# Altium PCB H3-chip-base.PcbDoc
Units mil, origin at the board's own origin, x right, y up, seen from the top; angles counter-clockwise.
Board outline 2027 x 2640 mil, 2 copper layers (Top Layer, Bottom Layer); 10 components, 44 nets, 118 pads, 31 vias.
Unrouted connection lines stored in the file: 24.
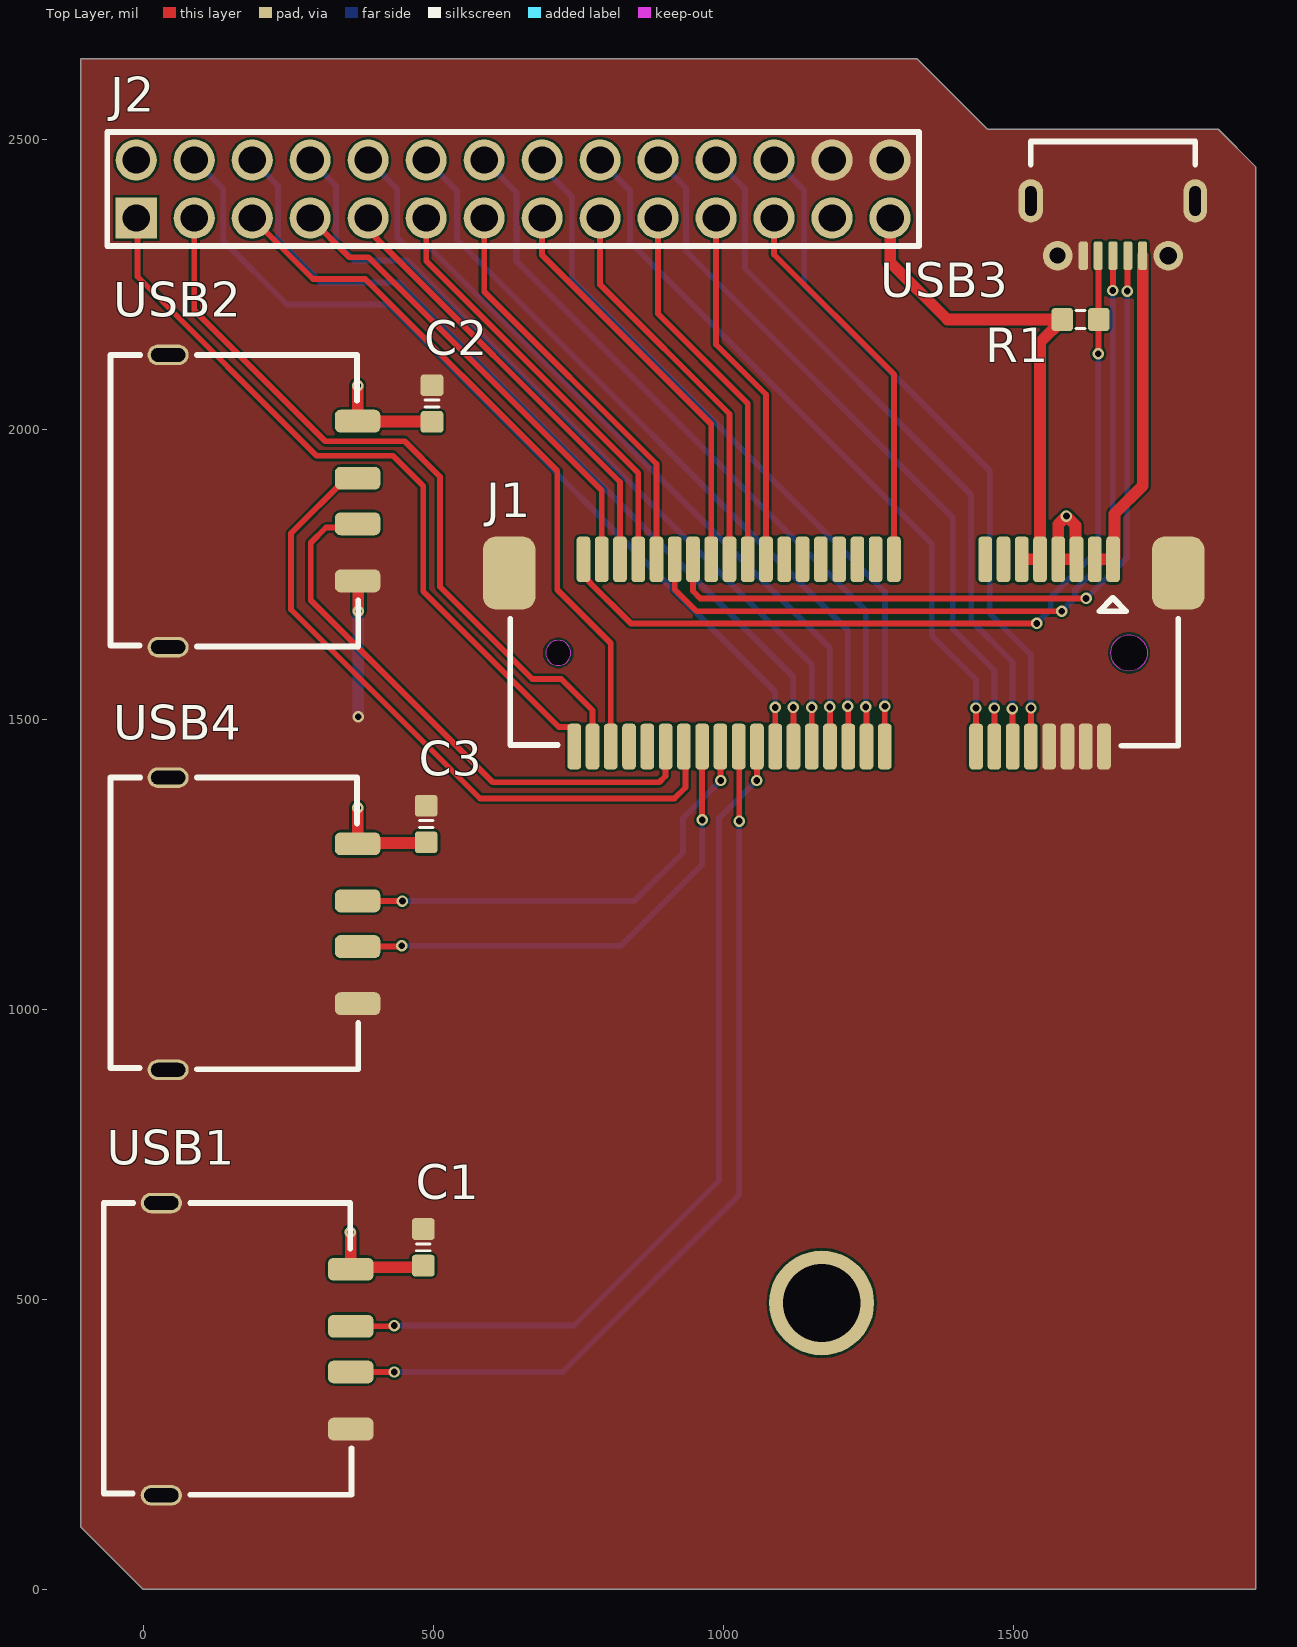
[diagram p0: Top Layer view]
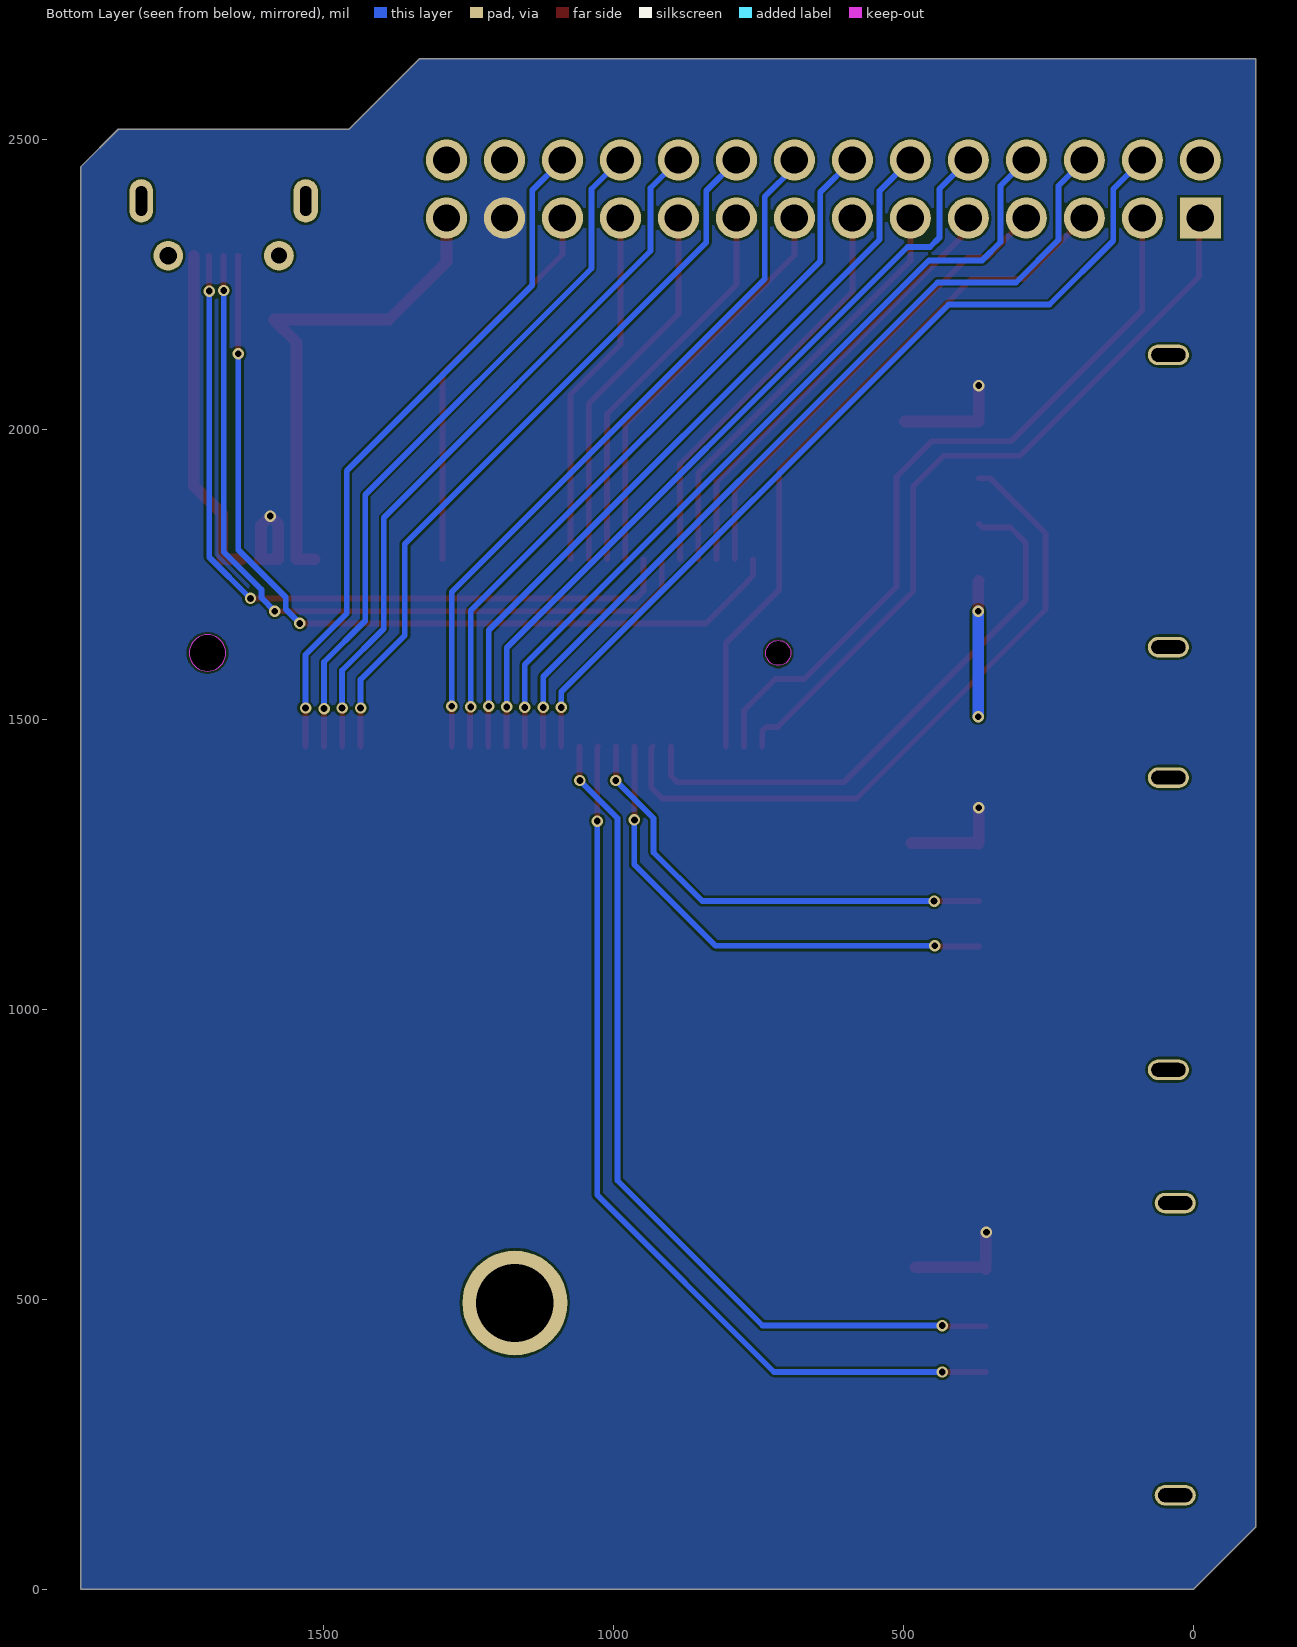
[diagram p1: Bottom Layer view, seen from below]
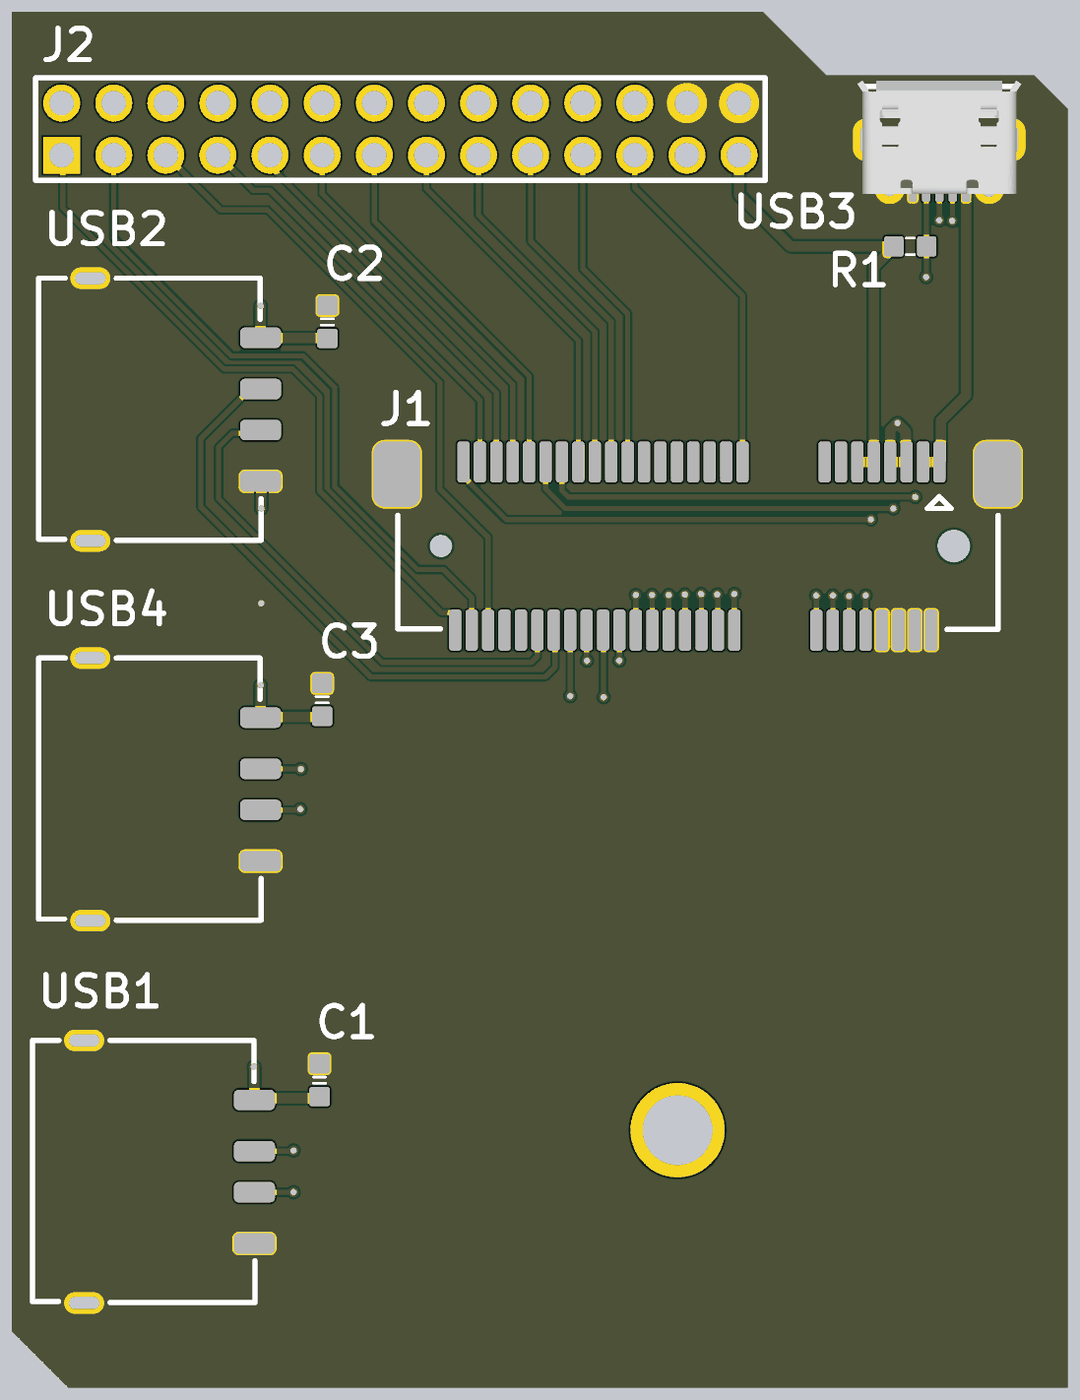
[diagram p2: 3D render of the assembled board from above, using the file's embedded part models]

## Layer stack, top to bottom
Top Solder: solder mask 0.4, Solder Resist, Dk 3.5
Top Layer: signal copper 1.4
Dielectric 1: dielectric 12.6, FR-4, Dk 4.8
Bottom Layer: signal copper 1.4
Bottom Solder: solder mask 0.4, Solder Resist, Dk 3.5

## Board outline
-108,108 0,0 1919,0 1919,2453 1854,2518 1456,2518 1334,2640 -108,2640

## Design rules (kind name [scope] priority, off if disabled: settings)
Clearance [All] p1: gap=4 ignorepadtopadclearanceinfootprint=FALSE except(0: Arc-Hole Track-Hole SMDPad-Hole THPad-Hole Via-Hole Fill-Hole Poly-Hole Region-Hole Text-Hole)
ComponentClearance [All] p1: gap=0 collisioncheckmode=3 verticalgap=0 showdistances=FALSE
DiffPairsRouting [All] p1: maxlimit=4 minlimit=4 mostfreqgap=4 toplayer_minwidth=4 toplayer_maxwidth=4 toplayer_prefwidth=4 bottomlayer_minwidth=4 bottomlayer_maxwidth=4 bottomlayer_prefwidth=4 maxuncoupledlength=500
FanoutControl Fanout_BGA [All] p1: bgadir=Out bgaviamode=Centered fanoutstyle=Auto fanoutdirection=Alternating viagrid=1 // Fanout_BGA (Default Rule)
HoleSize [All] p1: absolutevalues=TRUE maxlimit=10000 minlimit=8 maxpercent=80.000 minpercent=20.000
MinimumSolderMaskSliver [All] p1 off: minsoldermaskwidth=2
PlaneClearance [All] p1: clearance=8
PlaneConnect [All] p1: planeconnectstyle=Direct reliefexpansion=20 reliefentries=4 reliefconductorwidth=10 reliefairgap=10
PolygonConnect [All] p1: connectstyle=Direct reliefconductorwidth=10 reliefentries=4 polygonreliefangle="90 Angle" airgapwidth=10
RoutingVias [All] p1: holewidth=11.81 width=19.68 viastyle="Through Hole" minholewidth=11.81 minwidth=19.68 maxholewidth=28 maxwidth=50
SilkToSilkClearance [All] p1: silktosilkclearance=0
SilkToSolderMaskClearance [IsPad] p1: minsilkscreentomaskgap=0 clearancetoexposedcopper=TRUE
SolderMaskExpansion [All] p1: expansion=3
Width GND [(InNet('AGND') OR InNet('GND'))] p1: maxlimit=50 minlimit=4 preferedwidth=20
Width VCC [(InNet('VDD_SYS_3.3V') OR InNet('VDD_AV_3.3V') OR InNet('VDD_5V') OR InNet('VDD1V2-SYS') OR InNet('VDD1V1-EPHY') OR InNet('VDD-CPUX') OR InNet('VDD-CPUS') OR InNet('VDD-CPUFB') OR InNet('VCC-DRAM'))] p2: maxlimit=50 minlimit=4 preferedwidth=20
Width [All] p3: maxlimit=10000 minlimit=4 preferedwidth=10
21 further rules are at their usual default settings.

## Components (designator, comment, footprint, x,y, rotation, side; value= is the part's Value field where it differs from the comment)
C1 "22uF" CAP_0603 483,590 r90 top
C2 "22uF" CAP_0603 498,2045 r90 top
C3 "22uF" CAP_0603 488,1320 r90 top
J1 "mini PCI-E座" "mini PCI-E座" 1208,1615 r180 top
J2 "2*14p 2.54mm排针" "2*14p 2.54mm排针" 638,2415 r0 top
R1 "10K" RES_0603 1616.5,2190 r0 top
USB1 "USB typeA座" "USB typeA座" 358,414.37 r270 top
USB2 "USB typeA座" "USB typeA座" 369.77,1876.97 r270 top
USB3 "MicroUSB" MicroUSB 1672.41,2300 r180 top
USB4 "USB typeA座" "USB typeA座" 369.77,1148.03 r270 top

## Footprints (in the part's own frame and the unit in brackets; to place one, negate y for a bottom-side part, rotate by r counter-clockwise, add the part's x,y. Pads: shape width x height; smd on the part's side, far side on the other; paste and mask are expansions set on the pad)
"2*14p 2.54mm排针" [mm] "2*14p 2.54mm排针"
  rect 1.8x1.8 hole 1.2 mask+0.076: 1(-16.51,-1.27)
  round 1.8 hole 1.2 mask+0.076: 2(-16.51,1.27) 3(-13.97,-1.27) 4(-13.97,1.27) 5(-11.43,-1.27) 6(-11.43,1.27) 7(-8.89,-1.27) 8(-8.89,1.27) 9(-6.35,-1.27) 10(-6.35,1.27) 11(-3.81,-1.27) 12(-3.81,1.27) 13(-1.27,-1.27) 14(-1.27,1.27) 15(1.27,-1.27) 16(1.27,1.27) 17(3.81,-1.27) 18(3.81,1.27) 19(6.35,-1.27) 20(6.35,1.27) 21(8.89,-1.27) 22(8.89,1.27) 23(11.43,-1.27) 24(11.43,1.27) 25(13.97,-1.27) 26(13.97,1.27) 27(16.51,-1.27) 28(16.51,1.27)
  silkscreen extent -17.78,-2.5 17.78,2.5, body extent -17.78,-2.54 17.78,2.54, height 8.51
CAP_0603 [mm] "0603 Capacitor"
  rrect30% 0.95x1 smd mask+0.076: 1(-0.8,0) 2(0.8,0)
  silkscreen extent -0.15,-0.3 0.15,0.3
MicroUSB [mm] "MicroUSB"
  oval 1.03x1.9 hole 1.3 slot 0.5 at 0 deg mask+0.076: 0(-3.6,-2.4)
  round 1.3 hole 0.762 mask+0.076: 0(-2.425,0)
  round 1.3 hole 0.7 mask+0.076: 0(2.425,0)
  oval 1.07x1.9 hole 1.3 slot 0.5 at 0 deg mask+0.076: 0(3.6,-2.4)
  rrect50% 0.4x1.25 smd mask+0.076: 1(-1.3,0) 2(-0.65,0) 3(0,0) 4(0.65,0) 5(1.3,0)
  silkscreen extent -3.6,-5 3.6,-4, body extent -4,-5.29 4,0.24, height 2.74
"mini PCI-E座" [mm] "mini PCI-E座"
  rrect50% 0.6x2 smd mask+0.076: 1(-11.8,-4.1) 2(-11.4,4.1) 3(-11,-4.1) 4(-10.6,4.1) 5(-10.2,-4.1) 6(-9.8,4.1) 7(-9.4,-4.1) 8(-9,4.1) 9(-8.6,-4.1) 10(-8.2,4.1) 11(-7.8,-4.1) 12(-7.4,4.1) 13(-7,-4.1) 14(-6.6,4.1) 15(-6.2,-4.1) 16(-5.8,4.1) 17(-2.2,-4.1) 18(-1.8,4.1) 19(-1.4,-4.1) 20(-1,4.1) 21(-0.6,-4.1) 22(-0.2,4.1) 23(0.2,-4.1) 24(0.6,4.1) 25(1,-4.1) 26(1.4,4.1) 27(1.8,-4.1) 28(2.2,4.1) 29(2.6,-4.1) 30(3,4.1) 31(3.4,-4.1) 32(3.8,4.1) 33(4.2,-4.1) 34(4.6,4.1) 35(5,-4.1) 36(5.4,4.1) 37(5.8,-4.1) 38(6.2,4.1) 39(6.6,-4.1) 40(7,4.1) 41(7.4,-4.1) 42(7.8,4.1) 43(8.2,-4.1) 44(8.6,4.1) 45(9,-4.1) 46(9.4,4.1) 47(9.8,-4.1) 48(10.2,4.1) 49(10.6,-4.1) 50(11,4.1) 51(11.4,-4.1) 52(11.8,4.1)
  rrect50% 2.3x3.2 smd: 53(-14.65,-3.5) 54(14.65,-3.5)
  Keep-Out Layer board cut-out: 11.95,0 11.992,-0.21 12.111,-0.389 12.29,-0.508 12.5,-0.55 12.5,-0.55 12.71,-0.508 12.889,-0.389 13.008,-0.21 13.05,0 13.05,0 13.008,0.21 12.889,0.389 12.71,0.508 12.5,0.55 12.5,0.55 12.29,0.508 12.111,0.389 11.992,0.21 11.95,0
  Keep-Out Layer board cut-out: -12.5,-0.8 -12.806,-0.739 -13.066,-0.566 -13.239,-0.306 -13.3,0 -13.3,0 -13.239,0.306 -13.066,0.566 -12.806,0.739 -12.5,0.8 -12.5,0.8 -12.194,0.739 -11.934,0.566 -11.761,0.306 -11.7,0 -11.7,0 -11.761,-0.306 -11.934,-0.566 -12.194,-0.739 -12.5,-0.8
  silkscreen extent -14.66,-2.41 14.6,4.06, body extent -15.03,-5.1 14.97,5.1, height 4.01
RES_0603 [mm] "0603 Resistor"
  rrect30% 0.95x1 smd mask+0.076: 1(-0.8,0) 2(0.8,0)
  silkscreen extent -0.2,-0.4 0.2,0.4
"USB typeA座" [mm] "USB typeA座"
  oval 0.9x1.8 hole 1.5 slot 0.6 at 0 deg mask+0.076: 0(-6.4,-8.3) 0(6.4,-8.3)
  rrect50% 1x2 smd mask+0.076: 1(-3.5,0) 2(-1,0) 3(1,0) 4(3.5,0)
  silkscreen extent -6.4,-10.82 6.38,0.03, body extent -7.3,-10.86 7.3,0.03, height 6.31

## Part data
C1 C2 C3: library part CAP_0603_22uF, "0603"
R1: library part RES_0603_10K, "0603"
J1: System=Connector

## Free pads (board coordinates)
  round 181.1 hole 133.86 mask+3: PAD(1170,494)

## Via types
v1: diameter 19.68, hole 11.81, Top Layer to Bottom Layer, tented both sides, 31 vias

## Nets (pads, with @x,y where several pads share a name; then routed paths per layer and width w, separated by ;. In a path a pad name is that pad's centre, name@x,y a point inside that pad or via, vN(x,y) a via of type N, cw(c..) or ccw(c..) an arc to the next point about the centre after c; other vN are vias at no path point)
AP-RESET#: J1.48 J2.5 | length 1220.3
  Top Layer w10: J2.5 293,2260 383,2260 714,1929 714,1724 806.43,1631.57 J1.48
GND: C1.2 C2.2 C3.2 J1.2 J1.4 J1.6 J1.8 J1.53 J1.54 J2.26 J2.28 USB1.0 USB1.4 USB2.0 USB2.4 USB3.0 USB3.5 USB4.0 USB4.4 | length 234.7
  Top Layer w20: USB2.4 371,1737.94 v1(371,1687)
  Bottom Layer w20: v1(371,1505) v1(371,1687)
GPIOA10/STATUS-LED: J1.17 J2.23 | length 674.2
  Top Layer w10: J2.23 1088,2302 1294.61,2095.39 J1.17
GPIOG11: J1.52 J2.1 | length 1313.4
  Top Layer w10: J2.1 -10,2363 -10,2264 299,1955 431,1955 483,1903 483,1721 716.62,1487.38 736.69,1487.38 743.43,1480.64 J1.52
GPIOG12/USB0_OTGID: J1.51 R1.2 USB3.4 | length 1523.6
  Top Layer w10: J1.51 759.18,1748.37 769.87,1737.68 769.87,1736.78 840.64,1666 v1(1541,1666) ; USB3.4 1647.41,2299.41 1647.41,2190.59 R1.2@1647.5,2190.5 ; v1(1647,2131) 1647.5,2131.5 R1.2@1647.5,2190.5 ; R1.2 R1.2@1647.5,2190.5
  Bottom Layer w10: v1(1541,1666) 1565.16,1690.16 1565.16,1711.16 1647,1793 v1(1647,2131)
GPIOL3/K1: J1.49 J2.7 | length 816.1
  Top Layer w10: J2.7 355.5,2297.5 388.5,2297.5 790.68,1895.32 J1.49
GPIOL4/RECOVERY: J1.47 J2.9 | length 768.4
  Top Layer w10: J2.9 388,2344 822.17,1909.83 J1.47
GPIOL10/PWR-LED: J1.45 J2.11 | length 740
  Top Layer w10: J2.11 488,2291 853.67,1925.33 J1.45
GPIOL11/IR-RX: J1.43 J2.13 | length 711.7
  Top Layer w10: J2.13 588,2238 885.17,1940.83 J1.43
I2C0_SCL: J1.20 J2.14 | length 1284.5
  Top Layer w10: v1(1246,1522) 1247.37,1520.63 J1.20
  Bottom Layer w10: J2.14 643.57,2409.43 643.57,2290.43 1246,1688 v1(1246,1522)
I2C0_SDA: J1.18 J2.16 | length 1256.3
  Top Layer w10: J1.18 1278.87,1522.87 v1(1279,1523)
  Bottom Layer w10: J2.16 688,2453 739,2402 739,2260 1279,1720 v1(1279,1523)
RPHY_LINK_LED: J1.29
RPHY_RXN: J1.23
RPHY_RXP: J1.21
RPHY_SPD_LED: J1.19
RPHY_TXN: J1.27
RPHY_TXP: J1.25
SPI0_CLK: J1.12 J2.22 | length 1224.6
  Top Layer w10: v1@1498,1520 v1(1499,1519) 1499.34,1518.66 J1.12
  Bottom Layer w10: J2.22 1038,2415 1038,2278 1428,1888 1428,1670.31 1499,1599.31 v1(1499,1519)
SPI0_CS: J1.10 J2.24 | length 1195
  Top Layer w10: J1.10 1530.83,1519.83 v1(1531,1520)
  Bottom Layer w10: J2.24 1140,2413 1140,2249 1460,1929 1460,1683 1531,1612 v1(1531,1520)
SPI0_MISO: J1.14 J2.20 | length 1251.7
  Top Layer w10: J1.14 1467.84,1519.84 v1(1468,1520)
  Bottom Layer w10: J2.20 936,2417 936,2308 1396,1848 1396,1656.81 1468,1584.81 v1(1468,1520)
SPI0_MOSI: J1.16 J2.18 | length 1280
  Top Layer w10: v1(1436,1520) 1436.35,1519.65 J1.16
  Bottom Layer w10: J2.18 788,2464 840,2412 840,2323 1360,1803 1360,1645 1436,1569 v1(1436,1520)
TV_OUT: J1.30 J2.4 | length 1528.4
  Top Layer w10: J1.30 1089.89,1520.89 v1(1090,1521)
  Bottom Layer w10: J2.4 138,2415 138,2326 248,2216 422,2216 1090,1548 v1(1090,1521)
UART0_RX: J1.44
UART0_TX: J1.46
UART1_CTS: J1.24 J2.10 | length 1364.1
  Top Layer w10: v1(1184,1522) 1184.38,1521.62 J1.24
  Bottom Layer w10: J2.10 438,2415 438,2331 454,2315 493,2315 1184,1624 v1(1184,1522)
UART1_RTS: J1.28 J2.6 | length 1477.1
  Top Layer w10: v1(1121,1521) 1121.39,1520.61 J1.28
  Bottom Layer w10: J2.6 232.43,2420.57 232.43,2327.57 306,2254 441,2254 1121,1574 v1(1121,1521)
UART1_RX: J1.26 J2.8 | length 1423.7
  Top Layer w10: J1.26 1152.88,1520.88 v1(1153,1521)
  Bottom Layer w10: J2.8 332.43,2420.57 332.43,2323.57 364,2292 456,2292 1153,1595 v1(1153,1521)
UART1_TX: J1.22 J2.12 | length 1312.9
  Top Layer w10: v1(1215,1523) 1215.87,1522.13 J1.22
  Bottom Layer w10: J2.12 541,2412 541,2328 1215,1654 v1(1215,1523)
UART2_CTS: J1.31 J2.21 | length 624.3
  Top Layer w10: J2.21 988,2147 1074.14,2060.86 J1.31
UART2_RTS: J1.35 J2.17 | length 681
  Top Layer w10: J2.17 788,2250 1011.15,2026.85 J1.35
UART2_RX: J1.37 J2.15 | length 709.4
  Top Layer w10: J2.15 688,2301 979.65,2009.35 J1.37
UART2_TX: J1.33 J2.19 | length 652.6
  Top Layer w10: J2.19 888,2200 1042.65,2045.35 J1.33
UBOOT: J1.50 J2.3 | length 1305.5
  Top Layer w10: J2.3 88,2206 314,1980 451,1980 512,1919 512,1729 671,1570 721,1570 774.93,1516.07 J1.50
USB_DM0: J1.39 USB3.2 | length 1358.7
  Top Layer w10: J1.39 948.16,1721.62 960.78,1709 v1(1626,1709) ; v1(1697,2239) 1697.5,2239.5 1697.5,2299.5 USB3.2
  Bottom Layer w10: v1(1626,1709) 1697,1780 v1(1697,2239)
USB_DM1: J1.40 USB2.2 | length 1180
  Top Layer w10: USB2.2 350.09,1916.34 255,1821.25 255,1690 581,1364 916,1364 935,1383 935,1450.99 J1.40
USB_DM2: J1.36 USB4.2 | length 805.9
  Top Layer w10: USB4.2 446.6,1187.4 v1(447,1187) ; J1.36 995.4,1395.6 v1(996,1395)
  Bottom Layer w10: v1(447,1187) 847,1187 931,1271 931,1330 v1(996,1395)
USB_DM3: J1.32 USB1.2 | length 1514.7
  Top Layer w10: USB1.2 431.74,453.74 v1(433,455) ; v1(1058,1395) 1058.39,1395.39 J1.32
  Bottom Layer w10: v1(433,455) 743,455 993,705 993,1330 v1(1058,1395)
USB_DP0: J1.41 USB3.3 | length 1384.5
  Top Layer w10: J1.41 916.66,1724.34 954,1687 v1(1584,1687) ; v1(1672,2240) 1672.41,2240.41 USB3.3
  Bottom Layer w10: v1(1584,1687) 1607.16,1710.16 1607.16,1724.16 1672,1789 v1(1672,2240)
USB_DP1: J1.42 USB2.3 | length 990.5
  Top Layer w10: USB2.3 363.57,1831.4 315.4,1831.4 289,1805 289,1706 603,1392 890.06,1392 900.91,1402.86 J1.42
USB_DP2: J1.38 USB4.3 | length 856.4
  Top Layer w10: USB4.3 442.66,1108.66 444,1110 v1(446,1110) ; J1.38 963.91,1327.09 v1(964,1327)
  Bottom Layer w10: v1(446,1110) 824,1110 964,1250 v1(964,1327)
USB_DP3: J1.34 USB1.3 | length 1570.4
  Top Layer w10: USB1.3 v1(433,375) ; J1.34 1028,1452.48 v1(1028,1325)
  Bottom Layer w10: v1(433,375) 723,375 1028,680 v1(1028,1325)
VDD_5V: C1.1 C2.1 C3.1 J1.5 J1.7 J2.25 USB1.1 USB2.1 USB4.1 | length 757.3
  Top Layer w10: USB1.1 USB1.1@361.17,555.33 ; USB4.1 USB4.1@371.11,1287.17 ; USB2.1 USB2.1@370.4,2014.13 ; C1.1@479.83,555.33 C1.1 ; C3.1@486.66,1287.17 C3.1 ; C2.1@497.37,2014.13 C2.1
  Top Layer w20: v1(357,616) 358,615 USB1.1 ; USB1.1@361.17,555.33 C1.1@479.83,555.33 ; USB4.1 369.77,1347.77 v1(370,1348) ; USB2.1 369.77,2075.77 v1(370,2076) ; USB2.1@370.4,2014.13 C2.1@497.37,2014.13 ; USB4.1@371.11,1287.17 C3.1@486.66,1287.17 ; J1.7 1578.08,1837.08 v1(1592,1851) 1607.76,1835.24 1607.76,1778.23 J1.5 J1.7
VDD_SYS_3.3V: J1.9 J1.11 J2.27 R1.1 | length 875
  Top Layer w20: J2.27 1288,2289 1387,2190 R1.1 1585.01,2189.02 1546.58,2150.59 J1.9 J1.11
VDD_USB_5V: J1.1 J1.3 USB3.1 | length 576.2
  Top Layer w20: J1.3 J1.1 1675,1778.85 1675,1855 1723.59,1903.59 USB3.1
pads on no net: J1.13 J1.15 J2.2

## Polygon pours and split planes (outlines as drawn)
GND on Top Layer "GND_L01_P002" (solid, pour order 2): -108,108 0,0 1919,0 1919,2453 1854,2518 1456,2518 1334,2640 -108,2640
VDD_5V on Bottom Layer "VDD_5V_L02_P003" (solid, pour order 3): -108,108 0,0 1919,0 1919,2453 1854,2518 1456,2518 1334,2640 -108,2640

## Silkscreen, mask and mechanical layers (free items; w line width, h text height)
Mechanical 1:
  lines w10: -108,108 -108,2640 1334,2640 1456,2518 1854,2518 1919,2453 1919,2055 1919,0 0,0 -108,108